# Altium PCB Milk_It.PcbDoc
Units mil, origin at the board's own origin, x right, y up, seen from the top; angles counter-clockwise.
Board outline 4204.72 x 2000 mil, 2 copper layers (Top Layer, Bottom Layer); 18 components, 18 nets, 77 pads, 2 vias.
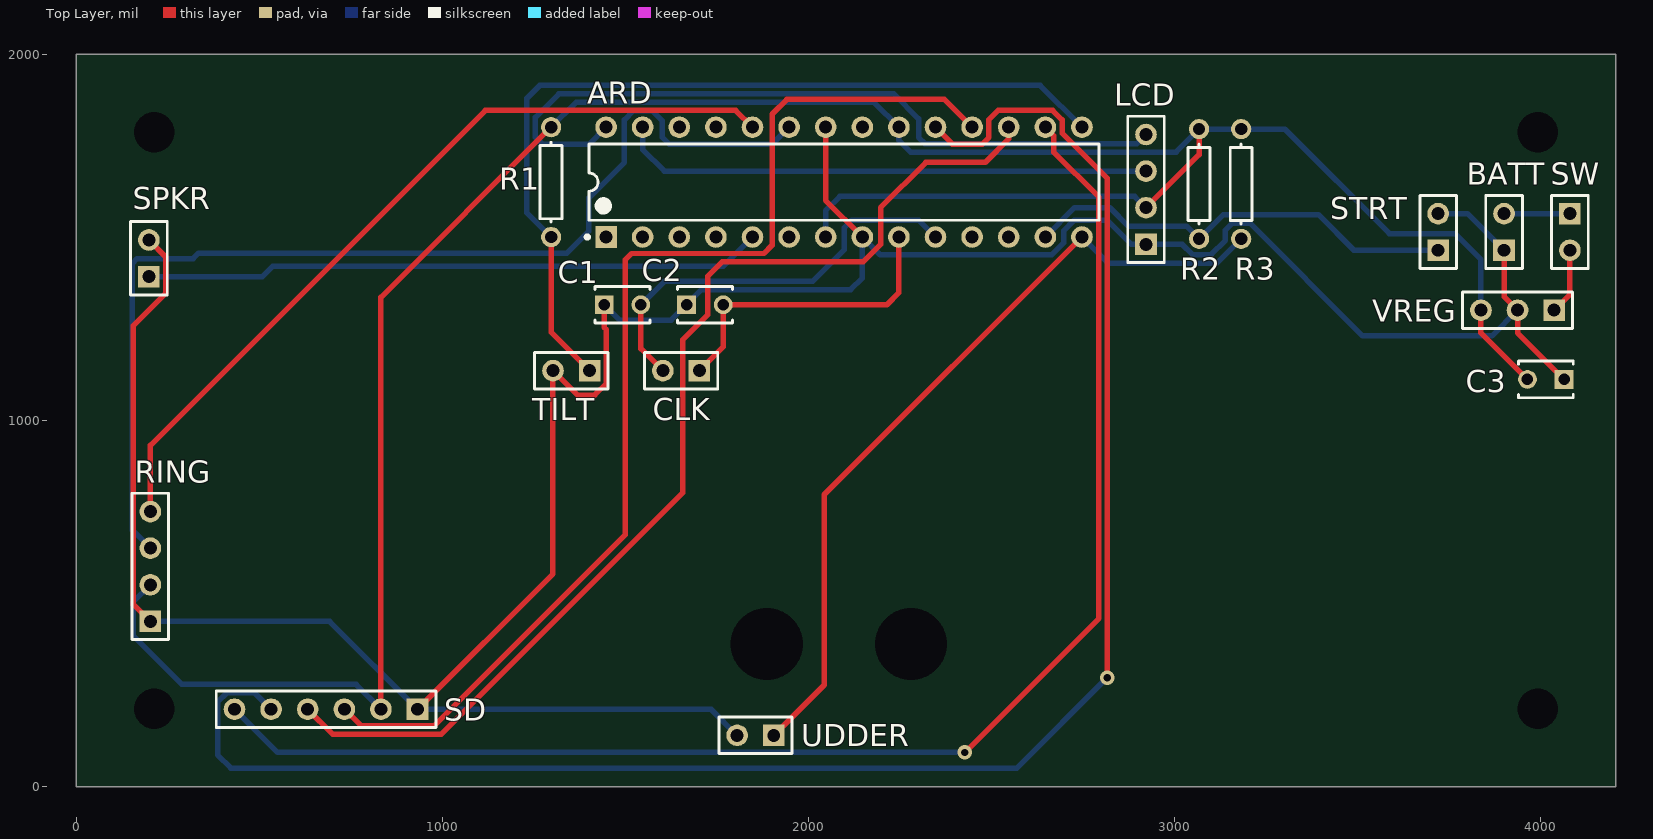
[diagram p0: Top Layer view]
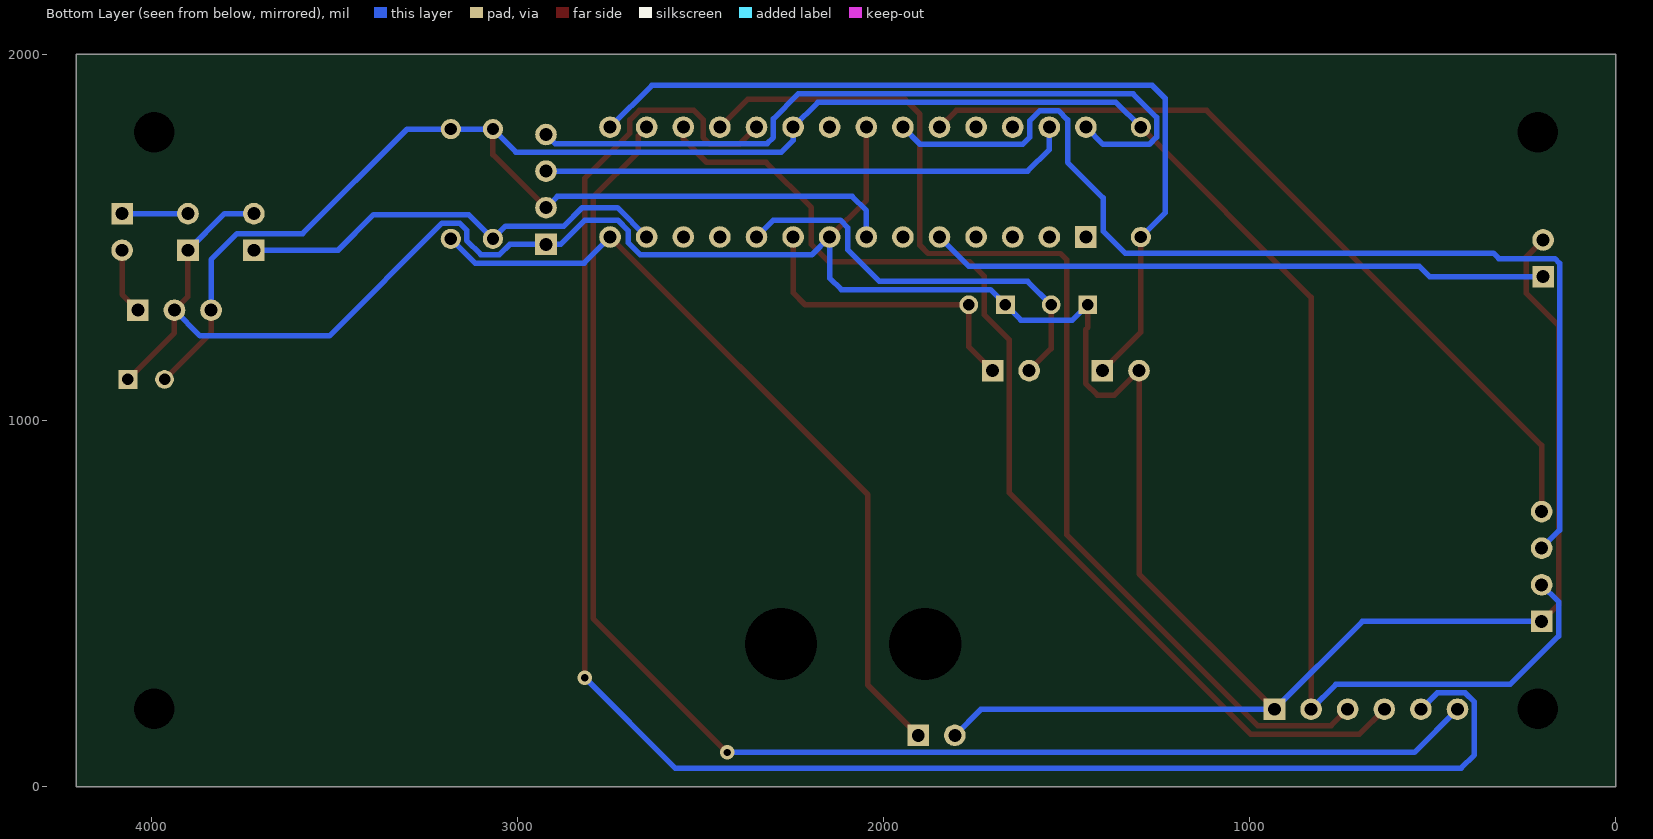
[diagram p1: Bottom Layer view, seen from below]

## Layer stack, top to bottom
Top Solder: solder mask 0.4, Solder Resist, Dk 3.5
Top Layer: signal copper 1.4
Dielectric 1: dielectric 12.6, FR-4, Dk 4.8
Bottom Layer: signal copper 1.4
Bottom Solder: solder mask 0.4, Solder Resist, Dk 3.5

## Board outline
0,0 0,2000 4204.72,2000 4204.72,0

## Design rules (kind name [scope] priority, off if disabled: settings)
BoardOutlineClearance [All] p1: gap=7.87 ignorepadtopadclearanceinfootprint=FALSE except(15.75: Arc-SplitBarrior Arc-SplitContinuation Track-SplitBarrior Track-SplitContinuation SMDPad-SplitBarrior SMDPad-SplitContinuation THPad-SplitBarrior THPad-SplitContinuation Via-SplitBarrior Via-SplitContinuation Fill-SplitBarrior Fill-SplitContinuation Poly-SplitBarrior Poly-SplitContinuation Region-SplitBarrior Region-SplitContinuation Text-SplitBarrior Text-SplitContinuation)
Clearance "Clearance Bottom Layer" [OnLayer('Bottom Layer')] p1: gap=8 ignorepadtopadclearanceinfootprint=TRUE except(10: Arc-Text Track-Text SMDPad-Text THPad-Text Via-Text Fill-Text Poly-Text Region-Text Text-Text)
Clearance "Clearance Top Layer" [OnLayer('Top Layer')] p2: gap=8 ignorepadtopadclearanceinfootprint=TRUE except(10: Arc-Text Track-Text SMDPad-Text THPad-Text Via-Text Fill-Text Poly-Text Region-Text Text-Text)
Clearance [All] p3: gap=7.87 ignorepadtopadclearanceinfootprint=FALSE except(3.5: Arc-Arc Arc-Track Arc-SMDPad Track-Track Track-SMDPad SMDPad-SMDPad; 5: Arc-Via Track-Via SMDPad-Via THPad-Via Via-Via; 10: Arc-Text Track-Text SMDPad-Text THPad-Text Via-Text Fill-Text Poly-Text Region-Text Text-Text)
HoleSize [All] p1: absolutevalues=TRUE maxlimit=248.03 minlimit=7.87 maxpercent=80.000 minpercent=20.000
MinimumAnnularRing [All] p1: minimumring=3
MinimumSolderMaskSliver [All] p1: minsoldermaskwidth=3.94
PolygonConnect PolygonConnect_1 [All] p1: thpad.connectstyle=Relief thpad.reliefconductorwidth=20 thpad.reliefentries=4 thpad.polygonreliefangle="90 Angle" thpad.airgapwidth=10 smdpad.connectstyle=Relief smdpad.reliefconductorwidth=20 smdpad.reliefentries=4 smdpad.polygonreliefangle="90 Angle" smdpad.airgapwidth=10 via.connectstyle=Direct via.reliefconductorwidth=20 via.reliefentries=4 via.polygonreliefangle="90 Angle" via.airgapwidth=10
RoutingCorners [All] p1: cornerstyle=Round minsetback=100 maxsetback=100
RoutingVias [All] p1: holewidth=19.68 width=39.37 viastyle="Through Hole" minholewidth=7.87 minwidth=17.72 maxholewidth=39.37 maxwidth=78.74
SilkToSilkClearance [All] p1: silktosilkclearance=3.94
SilkToSolderMaskClearance [IsPad] p1: minsilkscreentomaskgap=3.94 clearancetoexposedcopper=TRUE
SolderMaskExpansion [All] p1: expansion=4 istentingtop=FALSE
Width [All] p1: maxlimit=100 minlimit=3.5 preferedwidth=15
25 further rules are at their usual default settings.

## Components (designator, comment, footprint, x,y, rotation, side; value= is the part's Value field where it differs from the comment)
ARD "ATmega328P-PU" 28P3 2096.91,1651.15 r90 top
BATT "Header 2" HDR1X2 3900,1465 r90 top
C1 "C315C103K1R5TA" KEMT-C315-THT-2 1491.91,1316.15 r0 top
C2 "C315C103K1R5TA" KEMT-C315-THT-2 1716.91,1316.15 r0 top
C3 "C315C103K1R5TA" KEMT-C315-THT-2 4014,1112.13 r180 top
CLK "Header 2" HDR1X2 1701.91,1136.15 r180 top
LCD "Header 4" HDR1X4 2921.91,1481.15 r90 top
R1 "Res1" AXIAL-0.3 1296.91,1651.15 r90 top value=1K
R2 "Res1" AXIAL-0.3 3066.91,1646.15 r90 top value=1K
R3 "Res1" AXIAL-0.3 3181.91,1646.15 r90 top value=1K
RING "Header 4" HDR1X4 201.91,451.15 r90 top
SD "Header 6" HDR1X6 931.91,211.15 r180 top
SPKR "Header 2" HDR1X2 198.04,1393.11 r90 top
STRT "Header 2" HDR1X2 3720,1465 r90 top
SW "Header 2" HDR1X2 4080,1565 r270 top
TILT "Header 2" HDR1X2 1401.91,1136.15 r180 top
UDDER "Header 2" HDR1X2 1905,140 r180 top
VREG "Header 3" HDR1X3 4036.91,1301.15 r180 top

## Footprints (in the part's own frame and the unit in brackets; to place one, negate y for a bottom-side part, rotate by r counter-clockwise, add the part's x,y. Pads: shape width x height; smd on the part's side, far side on the other; paste and mask are expansions set on the pad)
28P3 [mm] "28-Pin Plastic Dual In-Line Package (PDIP)"
  rect 1.5x1.5 hole 0.9: 1(-3.81,16.51)
  round 1.5 hole 0.9: 2(-3.81,13.97) 3(-3.81,11.43) 4(-3.81,8.89) 5(-3.81,6.35) 6(-3.81,3.81) 7(-3.81,1.27) 8(-3.81,-1.27) 9(-3.81,-3.81) 10(-3.81,-6.35) 11(-3.81,-8.89) 12(-3.81,-11.43) 13(-3.81,-13.97) 14(-3.81,-16.51) 15(3.81,-16.51) 16(3.81,-13.97) 17(3.81,-11.43) 18(3.81,-8.89) 19(3.81,-6.35) 20(3.81,-3.81) 21(3.81,-1.27) 22(3.81,1.27) 23(3.81,3.81) 24(3.81,6.35) 25(3.81,8.89) 26(3.81,11.43) 27(3.81,13.97) 28(3.81,16.51)
  silkscreen extent -3.93,-17.7 2.65,17.93, body extent -3.6,-17.65 3.6,17.65, height 4.58
AXIAL-0.3 [mm] "Axial Device, Thru-Hole; 2 Leads; 0.3 in Pin Spacing"
  round 1.4 hole 0.85: 1(-3.81,0) 2(3.81,0)
  silkscreen extent -2.77,-0.76 2.77,0.76
HDR1X2 [mm] "Connector; Header; 2 Position"
  rect 1.5x1.5 hole 0.9: 1(0,0)
  round 1.5 hole 0.9: 2(2.54,0)
  silkscreen extent -1.27,-1.27 3.81,1.27
HDR1X3 [mm] "Connector; Header; 3 Position"
  rect 1.5x1.5 hole 0.9: 1(0,0)
  round 1.5 hole 0.9: 2(2.54,0) 3(5.08,0)
  silkscreen extent -1.27,-1.27 6.35,1.27
HDR1X4 [mm] "Connector; Header; 4 Position"
  rect 1.5x1.5 hole 0.9: 1(0,0)
  round 1.5 hole 0.9: 2(2.54,0) 3(5.08,0) 4(7.62,0)
  silkscreen extent -1.27,-1.27 8.89,1.27
HDR1X6 [mm] "Connector; Header; 6 Position"
  rect 1.5x1.5 hole 0.9: 1(0,0)
  round 1.5 hole 0.9: 2(2.54,0) 3(5.08,0) 4(7.62,0) 5(10.16,0) 6(12.7,0)
  silkscreen extent -1.27,-1.27 13.97,1.27
KEMT-C315-THT-2 [mm] "THD, 2-Leads, Body 3.81x2.54mm"
  rect 1.3x1.3 hole 0.8: 1(-1.27,0)
  round 1.3 hole 0.8: 2(1.27,0)
  silkscreen extent -1.91,-1.27 1.91,1.27, body extent -1.91,-1.27 1.91,1.27, height 4.66

## Part data
ARD: library part CMP-0095-00013-2, "8-bit AVR Microcontroller, 32KB Flash, 1KB EEPROM, 2KB SRAM, 28-pin PDIP, Industrial Grade (-40°C to 85°C)", ComponentLink1Description="Manufacturer URL", ComponentLink1URL=http://www.atmel.com/, ComponentLink2Description="ATmega48A/48PA/88A/88PA/168A/168PA/328/328P Datasheet", ComponentLink2URL=http://www.atmel.com/dyn/resources/prod_documents/8271.pdf, ComponentLink3Description="ATmega48A/48PA/88A/88PA/168A/168PA/328/328P Summary", ComponentLink3URL=http://www.atmel.com/dyn/resources/prod_documents/8271S.pdf, DatasheetVersion="revD, May-2011", PackageDescription="28-lead (0.300\"/7.62mm Wide) Plastic Dual Inline Package (PDIP)", PackageReference=28P3, PackageVersion="revB, Sep-2001", RevisionNote="DatasheetVersion updated. URLs added."
BATT CLK SPKR STRT SW TILT UDDER: "Header, 2-Pin", LatestRevisionDate=17-Jul-2002, LatestRevisionNote="Re-released for DXP Platform.", Publisher="Altium Limited"
C1 C2 C3: library part CMP-1664-00007-1, "Capacitor, Ceramic, 0.01 uF, +/- 10%, 100 V, X7R, -55 to 125 degC, 2-Pin THD, RoHS, Bulk", Case\Package=PDIP, Forward Current="60 mA", Forward Voltage="1.5 V", Max Operating Temperature="100 degC", Max Power Dissipation="400 mW", Min Operating Temperature="-55 degC", Output Voltage="70 V", Package Quantity=2000, Channels=2, ComponentLink1Description="Manufacturer URL", ComponentLink1URL=http://www.kemet.com/, ComponentLink2Description=Datasheet, ComponentLink2URL=http://capacitoredge.kemet.com/capedge2/DataSheet/Datasheet-C315C103K1R5TA.pdf?pn=C315C103K1R5TA{BULK}, DatasheetVersion=Aug-16, Mount="Through Hole", Nominal Vf="1.3 V", PackageDescription="2-Pin Through Hole Device, Body 3.81 x 2.54 mm", PackageReference=C315-THT-2, Packaging=Rail/Tube, Pins=16, Radiation Hardening=No, REACH SVHC=Unknown, RoHSCompliant=true, Vce Max="500 mV"
LCD RING: "Header, 4-Pin", LatestRevisionDate=17-Jul-2002, LatestRevisionNote="Re-released for DXP Platform.", Publisher="Altium Limited"
R1 R2 R3: "Resistor", LatestRevisionDate=17-Jul-2002, LatestRevisionNote="Re-released for DXP Platform.", PackageDescription="Axial Device, Thru-Hole; 2 Leads; 0.3 in Pin Spacing", PackageReference=AXIAL-0.3, Published=8-Jun-2000, Publisher="Altium Limited"
SD: "Header, 6-Pin", LatestRevisionDate=17-Jul-2002, LatestRevisionNote="Re-released for DXP Platform.", Publisher="Altium Limited"
VREG: "Header, 3-Pin", LatestRevisionDate=17-Jul-2002, LatestRevisionNote="Re-released for DXP Platform.", Publisher="Altium Limited"

## Free pads (board coordinates)
  round 0 hole 110.24: 1(3992.13,212.6) 2(3992.13,1787.4) 4(212.6,1787.4) 5(212.6,212.6)
  round 0 hole 196.85: 6(2279.53,389.76) 7(1885.83,389.76)

## Via types
v1: diameter 39.37, hole 19.68, Top Layer to Bottom Layer, 2 vias

## Nets (pads, with @x,y where several pads share a name; then routed paths per layer and width w, separated by ;. In a path a pad name is that pad's centre, name@x,y a point inside that pad or via, vN(x,y) a via of type N, cw(c..) or ccw(c..) an arc to the next point about the centre after c; other vN are vias at no path point)
NetARD_5: ARD.5 SPKR.1 | length 1693.6
  Bottom Layer w15: SPKR.1 507.87,1393.11 535.91,1421.15 1766.91,1421.15 ARD.5
NetARD_7: ARD.7 ARD.20 C3.2 LCD.2 R1.2 R2.2 R3.2 RING.2 SD.2 VREG.3 | length 7150.9
  Top Layer w15: SD.2 831.91,1336.15 R1.2 ; LCD.2 3066.91,1726.15 R2.2 ; VREG.3 3836.91,1239.21 C3.2
  Bottom Layer w15: RING.2 155.91,505.15 155.91,411.15 287.88,279.18 763.88,279.18 SD.2 ; R1.2 1364.94,1869.18 2178.88,1869.18 ARD.20 2246.91,1765.09 2278.88,1733.12 3003.88,1733.12 R2.2 R3.2 3300.91,1796.15 3586.91,1510.15 3765.91,1510.15 3836.91,1439.15 VREG.3 ; ARD.7 2046.91,1573.15 2085.91,1612.15 2890.91,1612.15 LCD.2
NetARD_8: ARD.8 ARD.22 BATT.1 C1.1 C2.1 C3.1 LCD.1 RING.1 SD.1 SPKR.2 STRT.2 TILT.2 UDDER.2 VREG.2 | length 8313.5
  Top Layer w15: SPKR.2 243.91,1447.24 243.91,1347.15 155.91,1259.15 155.91,497.15 RING.1 ; SD.1 1301.91,581.15 TILT.2 1368.91,1069.15 1415.91,1069.15 1447.91,1101.15 1447.91,1248.15 1441.91,1254.15 C1.1 ; ARD.22 2046.91,1601.15 ARD.8 ; BATT.1 3900,1338.06 VREG.2 3936.91,1239.21 C3.1
  Bottom Layer w15: RING.1 691.91,451.15 SD.1 1733.85,211.15 UDDER.2 ; C1.1 1483.91,1274.15 1624.91,1274.15 C2.1 1708,1357.24 2115,1357.24 2146.91,1389.15 ARD.8 2195.91,1452.15 2663.91,1452.15 2696.91,1485.15 2696.91,1518.15 2725.91,1547.15 2815.91,1547.15 2881.91,1481.15 LCD.1 3020.91,1481.15 3048.97,1453.09 3099.91,1453.09 3138.85,1492.03 3138.85,1520.15 3157.91,1539.21 3205.91,1539.21 3513.97,1231.15 3866.91,1231.15 VREG.2 ; STRT.2 3800,1565 BATT.1
NetARD_9: ARD.9 C2.2 CLK.1 | length 852.6
  Top Layer w15: CLK.1 1766.91,1201.15 C2.2 2213.91,1316.15 2246.91,1349.15 ARD.9
NetARD_10: ARD.10 C1.2 CLK.2 | length 1159.7
  Top Layer w15: C1.2 1541.91,1196.15 CLK.2
  Bottom Layer w15: C1.2 1606,1380.24 2011,1380.24 2096.91,1466.15 2096.91,1526.15 2117.91,1547.15 2300.91,1547.15 ARD.10
NetARD_13: ARD.13 R2.1 STRT.1 | length 1209.1
  Bottom Layer w15: ARD.13 2726.91,1581.15 2822.91,1581.15 2872.91,1531.15 3031.91,1531.15 R2.1 3132.97,1562.21 3392.85,1562.21 3490.06,1465 STRT.1
NetARD_14: ARD.14 R3.1 UDDER.1 | length 2201.7
  Top Layer w15: UDDER.1 2042.91,277.91 2042.91,797.15 ARD.14
  Bottom Layer w15: ARD.14 2817.97,1430.09 3115.85,1430.09 R3.1
NetARD_15: ARD.15 R1.1 TILT.1 | length 2392.7
  Top Layer w15: R1.1 1296.91,1241.15 TILT.1
  Bottom Layer w15: R1.1 1230.85,1567.21 1230.85,1880.24 1265.79,1915.18 2632.88,1915.18 ARD.15
NetARD_16: ARD.16 SD.6 | length 3964
  Top Layer w15: v1(2426.91,93.15) 2792.91,459.15 2792.91,1609.91 2669.7,1733.12 2669.7,1778.37 ARD.16
  Bottom Layer w15: SD.6 549.91,93.15 v1(2426.91,93.15)
NetARD_17: ARD.17 SD.4 | length 3013.6
  Top Layer w15: SD.4 699.94,143.12 996.88,143.12 1655.91,802.15 1655.91,1220.15 1724.91,1289.15 1724.91,1394.15 1763.88,1433.12 2148.88,1433.12 2196.91,1481.15 2196.91,1581.15 2320.89,1705.13 2482.79,1705.13 2546.91,1769.25 ARD.17
NetARD_18: ARD.18 SD.3 | length 3123.5
  Top Layer w15: SD.3 776.94,166.12 977.91,166.12 1499.91,688.12 1499.91,1439.15 1516.88,1456.12 1877.91,1456.12 1900.91,1479.12 1900.91,1837.15 1940.91,1877.15 2370.91,1877.15 ARD.18
NetARD_19: ARD.19 SD.5 | length 4884.8
  Top Layer w15: ARD.19 2392.91,1755.15 2474.91,1755.15 2492.91,1773.15 2492.91,1822.15 2517.91,1847.15 2666.91,1847.15 2692.91,1821.15 2692.91,1785.15 2815.91,1662.15 v1(2815.91,297.15)
  Bottom Layer w15: SD.5 486.88,256.18 410.94,256.18 385.91,231.15 385.91,86.15 421.91,50.15 2568.91,50.15 v1(2815.91,297.15)
NetARD_23: ARD.23 RING.3 | length 2969.4
  Bottom Layer w15: RING.3 152.91,700.15 152.91,1429.15 165.91,1442.15 318.91,1442.15 333.91,1457.15 1339.91,1457.15 1399.91,1517.15 1399.91,1608.15 1496.91,1705.15 1496.91,1821.15 1521.94,1846.18 1572.88,1846.18 1600.91,1818.15 1600.91,1773.15 1618.91,1755.15 1900.91,1755.15 ARD.23
NetARD_24: ARD.24 RING.4 | length 2224.1
  Top Layer w15: RING.4 201.91,932.15 1116.91,1847.15 1800.91,1847.15 ARD.24
NetARD_27: ARD.27 LCD.3 | length 1460.4
  Bottom Layer w15: ARD.27 1546.91,1740.15 1605.91,1681.15 LCD.3
NetARD_28: ARD.28 LCD.4 | length 2065.9
  Bottom Layer w15: ARD.28 1399.91,1754.15 1273.91,1754.15 1253.85,1774.21 1253.85,1828.09 1317.94,1892.18 2232.88,1892.18 2300.91,1824.15 2300.91,1773.15 2317.94,1756.12 2896.88,1756.12 LCD.4
NetBATT_2: BATT.2 SW.1 | length 180
  Bottom Layer w15: BATT.2 SW.1
NetSW_2: SW.2 VREG.1 | length 181.7
  Top Layer w15: VREG.1 4080,1344.24 SW.2
pads on no net: ARD.1 ARD.2 ARD.3 ARD.4 ARD.6 ARD.11 ARD.12 ARD.21 ARD.25 ARD.26

## Silkscreen, mask and mechanical layers (free items; w line width, h text height)
Mechanical 2:
  circle w0.5: c1885.83,389.76 r98.43
  circle w0.5: c3992.13,1787.4 r55.12
  circle w0.5: c2279.53,389.76 r98.43
  circle w0.5: c212.6,1787.4 r55.12
  circle w0.5: c3992.13,212.6 r55.12
  circle w0.5: c212.6,212.6 r55.12
  circle w0.25: c-217.84,-178.6 r0.12
  circle w0.25: c772.16,816.4 r0.12
  lines w0.5: 0,0 4204.72,0 4204.72,2000 0,2000 0,0 ; 1590.55,94.49 1590.55,685.04 2574.8,685.04 2574.8,94.49 1590.55,94.49